# Allegro board TubiiPCB_V2.brd

Outline 406.4 x 406.4 mm; copper layers: TOP, GND_TOP, VTT, VEE, VCC, GND_BOT, BOTTOM. Coordinates in mm from the lower left corner of the outline.
Outline path: rectangle 0,0 406.4,406.4

## Design rules (mm)
net group DP_BCKP_CLK_BUFD: nets BCKP_CLK_BUFD_N BCKP_CLK_BUFD_P
net group DP_CHANGE_CLK2: nets CHANGE_CLK2_N CHANGE_CLK2_P
net group DP_CHOSEN_CLK: nets CHOSEN_CLK_N CHOSEN_CLK_P
net group DP_CHOSEN_CLK2: nets CHOSEN_CLK2_N CHOSEN_CLK2_P
net group DP_CLK_BAD: nets CLK_BAD_N CLK_BAD_P
net group DP_DEF_CLK_DIV2: nets DEF_CLK_DIV2_N DEF_CLK_DIV2_P
net group DP_DEF_CLK_DIV4: nets DEF_CLK_DIV4_N DEF_CLK_DIV4_P
net group DP_DEF_CLK_DIV8: nets DEF_CLK_DIV8_N DEF_CLK_DIV8_P
net group DP_DEF_CLK_DIVD: nets DEF_CLK_DIVD_N DEF_CLK_DIVD_P
net group DP_GT2_N: nets GT2_N UNNAMED_1_CAENCOMS_I8_GT2P
net group DP_RIB1: nets RIB1_N RIB1_P
net group DP_RIB2: nets RIB2_N RIB2_P
net group DP_RIB3: nets RIB3_N RIB3_P
net group DP_RIB4: nets RIB4_N RIB4_P
net group DP_RIB5: nets RIB5_N RIB5_P
net group DP_RIB6: nets RIB6_N RIB6_P
net group DP_RIB7: nets RIB7_N RIB7_P
net group DP_RIB8: nets RIB8_N RIB8_P
net group DP_RIB9: nets RIB9_N RIB9_P
net group DP_RIB10: nets RIB10_N RIB10_P
net group DP_SMELLIE_DELAY_BUF: nets SMELLIE_DELAY_BUF_N SMELLIE_DELAY_BUF_P
net group DP_SYNC24_2: nets SYNC24_2_N SYNC24_2_P
net group DP_SYNC_2: nets SYNC_2_N SYNC_2_P
net group DP_TELLIE_DELAY_BUF: nets TELLIE_DELAY_BUF_N TELLIE_DELAY_BUF_P
net group DP_TRIG_GATE1: nets TRIG_GATE1_N TRIG_GATE1_P
net group DP_TRIG_GATE2: nets TRIG_GATE2_N TRIG_GATE2_P
net group DP_TRIG_PULS1: nets TRIG_PULS1_N TRIG_PULS1_P
net group DP_TRIG_PULS2: nets TRIG_PULS2_N TRIG_PULS2_P
net group DP_UNNAMED_1_AD96687_I1_Q1: nets UNNAMED_1_AD96687_I1_Q1 UNNAMED_1_AD96687_I1_Q1_1
net group DP_UNNAMED_1_AD96687_I1_Q2: nets UNNAMED_1_AD96687_I1_Q2 UNNAMED_1_AD96687_I1_Q2_1
net group DP_UNNAMED_1_CHANGECLKS_I3_BCKPCLK2: nets UNNAMED_1_CHANGECLKS_I3_BCKPC_1 UNNAMED_1_CHANGECLKS_I3_BCKPCLK
net group DP_UNNAMED_1_CHANGECLKS_I3_BCKPCLK3: nets UNNAMED_1_CHANGECLKS_I3_BCKPC_2 UNNAMED_1_CHANGECLKS_I3_BCKPC_3
net group DP_UNNAMED_1_CHANGECLKS_I3_CHANGECLK: nets UNNAMED_1_CHANGECLKS_I3_CHANG_1 UNNAMED_1_CHANGECLKS_I3_CHANGEC
net group DP_UNNAMED_1_CHANGECLKS_I3_DEFAULTCLK2: nets UNNAMED_1_CHANGECLKS_I3_DEFAU_1 UNNAMED_1_CHANGECLKS_I3_DEFAULT
net group DP_UNNAMED_1_CSMD0603_I10_B: nets UNNAMED_1_CSMD0603_I10_B_1 UNNAMED_1_FRONTPORTS_I2_SMELLIE
net group DP_UNNAMED_1_CSMD0603_I54_B: nets UNNAMED_1_CSMD0603_I54_B UNNAMED_1_FRONTPORTS_I2_EXTT<0>
net group DP_UNNAMED_1_CSMD0603_I55_A: nets UNNAMED_1_CSMD0603_I55_A UNNAMED_1_FRONTPORTS_I2_EXTT<4>
net group DP_UNNAMED_1_CSMD0805_I64_B: nets UNNAMED_1_CSMD0805_I64_B UNNAMED_1_CSMD0805_I70_B
net group DP_UNNAMED_1_DEFAULTCLKSEL_I1_DEFAULTCLK: nets UNNAMED_1_DEFAULTCLKSEL_I1_BCKP UNNAMED_1_MC10E116_I1_D0
net group DP_UNNAMED_1_FRONTPORTS_I2_CLK100: nets UNNAMED_1_FRONTPORTS_I2_CLK100N UNNAMED_1_FRONTPORTS_I2_CLK100P
net group DP_UNNAMED_1_FRONTPORTS_I2_ECLTOLVDSIN: nets UNNAMED_1_FRONTPORTS_I2_ECLTOLV UNNAMED_1_MC10E116_I22_D0
net group DP_UNNAMED_1_FRONTPORTS_I2_GT: nets UNNAMED_1_FRONTPORTS_I2_GTN UNNAMED_1_FRONTPORTS_I2_GTP
net group DP_UNNAMED_1_FRONTPORTS_I2_LOSTAROUT: nets UNNAMED_1_FRONTPORTS_I2_LOSTA_1 UNNAMED_1_FRONTPORTS_I2_LOSTARO
net group DP_UNNAMED_1_FRONTPORTS_I2_MTCAMIMIC1OUT: nets UNNAMED_1_FRONTPORTS_I2_MTCAM_1 UNNAMED_1_FRONTPORTS_I2_MTCAMIM
net group DP_UNNAMED_1_FRONTPORTS_I2_MTCAMIMIC2OUT: nets UNNAMED_1_FRONTPORTS_I2_MTCAM_3 UNNAMED_1_FRONTPORTS_I2_MTCAM_4
net group DP_UNNAMED_1_FRONTPORTS_I2_MTCDLO: nets LO_STAR_RAW UNNAMED_1_MC10E116_I2_D0
net group DP_UNNAMED_1_FRONTPORTS_I2_RIBBONPULSEIN: nets UNNAMED_1_FRONTPORTS_I2_RIBBO_1 UNNAMED_1_FRONTPORTS_I2_RIBBONP
net group DP_UNNAMED_1_FRONTPORTS_I2_RIBBONPULSEOUT: nets UNNAMED_1_FRONTPORTS_I2_RIBBO_2 UNNAMED_1_FRONTPORTS_I2_RIBBO_3
net group DP_UNNAMED_1_FRONTPORTS_I2_SYNC: nets UNNAMED_1_FRONTPORTS_I2_SYNCN UNNAMED_1_FRONTPORTS_I2_SYNCP
net group DP_UNNAMED_1_FRONTPORTS_I2_SYNC24: nets UNNAMED_1_FRONTPORTS_I2_SYNC24N UNNAMED_1_FRONTPORTS_I2_SYNC24P
net group DP_UNNAMED_1_FRONTPORTS_I2_SYNC24LVDS: nets UNNAMED_1_FRONTPORTS_I2_SYNC2_1 UNNAMED_1_FRONTPORTS_I2_SYNC24L
net group DP_UNNAMED_1_FRONTPORTS_I2_SYNCLVDS: nets UNNAMED_1_FRONTPORTS_I2_SYNCL_1 UNNAMED_1_FRONTPORTS_I2_SYNCLVD
net group DP_UNNAMED_1_MC10E116_I1_Q0: nets UNNAMED_1_MC10E116_I1_Q0 UNNAMED_1_MC10E116_I1_Q0_1
net group DP_UNNAMED_1_MC10E116_I1_Q3: nets UNNAMED_1_MC10E116_I1_Q3 UNNAMED_1_MC10E116_I1_Q3_1
net group DP_UNNAMED_1_MC10E116_I3_Q0: nets UNNAMED_1_MC10E116_I3_Q0 UNNAMED_1_MC10E116_I3_Q0_1
net group DP_UNNAMED_1_MC10E116_I3_Q1: nets UNNAMED_1_MC10E116_I3_Q1 UNNAMED_1_MC10E116_I3_Q1_1
net group DP_UNNAMED_1_MC10E116_I3_Q2: nets UNNAMED_1_MC10E116_I3_Q2 UNNAMED_1_MC10E116_I3_Q2_1
net group DP_UNNAMED_1_MC10E116_I3_Q3: nets UNNAMED_1_MC10E116_I3_Q3 UNNAMED_1_MC10E116_I3_Q3_1
net group DP_UNNAMED_1_MC10E116_I4_Q0: nets UNNAMED_1_MC10E116_I4_Q0 UNNAMED_1_MC10E116_I4_Q0_1
net group DP_UNNAMED_1_MC10E116_I4_Q1: nets UNNAMED_1_MC10E116_I4_Q1 UNNAMED_1_MC10E116_I4_Q1_1
net group DP_UNNAMED_1_MC10E116_I4_Q2: nets UNNAMED_1_MC10E116_I4_Q2 UNNAMED_1_MC10E116_I4_Q2_1
net group DP_UNNAMED_1_MC10E116_I4_Q3: nets UNNAMED_1_MC10E116_I4_Q3 UNNAMED_1_MC10E116_I4_Q3_1
net group DP_UNNAMED_1_MC10E116_I22_Q0: nets UNNAMED_1_MC10E116_I22_Q0 UNNAMED_1_MC10E116_I22_Q0_1
net group DP_UNNAMED_1_MC10E116_I22_Q1: nets UNNAMED_1_MC10E116_I22_Q1 UNNAMED_1_MC10E116_I22_Q1_1
net group DP_USE_BCKP: nets USE_BCKP_N USE_BCKP_P
net group DP_USE_DEFAULT: nets USE_DEFAULT_N USE_DEFAULT_P
net group BACKPLANE_IN: nets BACKPLANE_IN<1> BACKPLANE_IN<2> BACKPLANE_IN<3> BACKPLANE_IN<4> BACKPLANE_IN<5> BACKPLANE_IN<6> BACKPLANE_IN<7> BACKPLANE_IN<8> BACKPLANE_IN<9> BACKPLANE_IN<10>
net group BACKPLANE_OUT: nets BACKPLANE_OUT<1> BACKPLANE_OUT<2> BACKPLANE_OUT<3> BACKPLANE_OUT<4> BACKPLANE_OUT<5> BACKPLANE_OUT<6> BACKPLANE_OUT<7> BACKPLANE_OUT<8> BACKPLANE_OUT<9> BACKPLANE_OUT<10>
net group CAEN_BUFF_CNTRL: nets CAEN_BUFF_CNTRL<0> CAEN_BUFF_CNTRL<1> CAEN_BUFF_CNTRL<2> CAEN_BUFF_CNTRL<3> CAEN_BUFF_CNTRL<4> CAEN_BUFF_CNTRL<5> CAEN_BUFF_CNTRL<6> CAEN_BUFF_CNTRL<7>
net group CNTRL_RAW: nets CNTRL_RAW<0> CNTRL_RAW<1> CNTRL_RAW<2> CNTRL_RAW<3> CNTRL_RAW<4> CNTRL_RAW<5> CNTRL_RAW<6> CNTRL_RAW<7>
net group COUNT_DATA_ECL: nets COUNT_DATA_ECL<1> COUNT_DATA_ECL<2> COUNT_DATA_ECL<3> COUNT_DATA_ECL<4> COUNT_DATA_ECL<5> COUNT_DATA_ECL<6> COUNT_DATA_ECL<7>
net group LE: nets UNNAMED_1_HCT238_I53_A0 UNNAMED_1_HCT238_I53_A1 UNNAMED_1_HCT238_I53_A2
net group UNNAMED_1_EXTTRIGS_I70_EXTTRIGO: nets UNNAMED_1_EXTTRIGS_I70_EXTT<10> UNNAMED_1_EXTTRIGS_I70_EXTT<11> UNNAMED_1_EXTTRIGS_I70_EXTT<12> UNNAMED_1_EXTTRIGS_I70_EXTT<13> UNNAMED_1_EXTTRIGS_I70_EXTT<14> UNNAMED_1_EXTTRIGS_I70_EXTT<15> UNNAMED_1_EXTTRIGS_I70_EXTTR<0> UNNAMED_1_EXTTRIGS_I70_EXTTR<1> UNNAMED_1_EXTTRIGS_I70_EXTTR<2> UNNAMED_1_EXTTRIGS_I70_EXTTR<3> UNNAMED_1_EXTTRIGS_I70_EXTTR<4> UNNAMED_1_EXTTRIGS_I70_EXTTR<5> UNNAMED_1_EXTTRIGS_I70_EXTTR<6> UNNAMED_1_EXTTRIGS_I70_EXTTR<7> UNNAMED_1_EXTTRIGS_I70_EXTTR<8> UNNAMED_1_EXTTRIGS_I70_EXTTR<9>
net group UNNAMED_1_FRONTPORTS_I2_CAENOUT: nets UNNAMED_1_FRONTPORTS_I2_CAEN<0> UNNAMED_1_FRONTPORTS_I2_CAEN<1> UNNAMED_1_FRONTPORTS_I2_CAEN<2> UNNAMED_1_FRONTPORTS_I2_CAEN<3> UNNAMED_1_FRONTPORTS_I2_CAEN<4> UNNAMED_1_FRONTPORTS_I2_CAEN<5> UNNAMED_1_FRONTPORTS_I2_CAEN<6> UNNAMED_1_FRONTPORTS_I2_CAEN<7>
net group UNNAMED_1_FRONTPORTS_I2_EXTTRIG: nets UNNAMED_1_FRONTPORTS_I2_EXT<10> UNNAMED_1_FRONTPORTS_I2_EXT<11> UNNAMED_1_FRONTPORTS_I2_EXT<12> UNNAMED_1_FRONTPORTS_I2_EXT<13> UNNAMED_1_FRONTPORTS_I2_EXT<14> UNNAMED_1_FRONTPORTS_I2_EXT<15> UNNAMED_1_FRONTPORTS_I2_EXTT<1> UNNAMED_1_FRONTPORTS_I2_EXTT<2> UNNAMED_1_FRONTPORTS_I2_EXTT<3> UNNAMED_1_FRONTPORTS_I2_EXTT<5> UNNAMED_1_FRONTPORTS_I2_EXTT<6> UNNAMED_1_FRONTPORTS_I2_EXTT<7> UNNAMED_1_FRONTPORTS_I2_EXTT<8> UNNAMED_1_FRONTPORTS_I2_EXTT<9>
net group UNNAMED_1_FRONTPORTS_I2_PULSE_2: nets UNNAMED_1_FRONTPORTS_I2_PUL<10> UNNAMED_1_FRONTPORTS_I2_PUL<11> UNNAMED_1_FRONTPORTS_I2_PULS<0> UNNAMED_1_FRONTPORTS_I2_PULS<1> UNNAMED_1_FRONTPORTS_I2_PULS<2> UNNAMED_1_FRONTPORTS_I2_PULS<3> UNNAMED_1_FRONTPORTS_I2_PULS<4> UNNAMED_1_FRONTPORTS_I2_PULS<5> UNNAMED_1_FRONTPORTS_I2_PULS<6> UNNAMED_1_FRONTPORTS_I2_PULS<7> UNNAMED_1_FRONTPORTS_I2_PULS<8> UNNAMED_1_FRONTPORTS_I2_PULS<9>
net group UNNAMED_1_FRONTPORTS_I2_SCALER: nets UNNAMED_1_FRONTPORTS_I2_SCAL<1> UNNAMED_1_FRONTPORTS_I2_SCAL<2> UNNAMED_1_FRONTPORTS_I2_SCAL<3> UNNAMED_1_FRONTPORTS_I2_SCAL<4> UNNAMED_1_FRONTPORTS_I2_SCAL<5> UNNAMED_1_FRONTPORTS_I2_SCAL<6>
net group UNNAMED_1_FRONTPORTS_I2_SCOPEOU: nets UNNAMED_1_FRONTPORTS_I2_SCOP<0> UNNAMED_1_FRONTPORTS_I2_SCOP<1> UNNAMED_1_FRONTPORTS_I2_SCOP<2> UNNAMED_1_FRONTPORTS_I2_SCOP<3> UNNAMED_1_FRONTPORTS_I2_SCOP<4> UNNAMED_1_FRONTPORTS_I2_SCOP<5> UNNAMED_1_FRONTPORTS_I2_SCOP<6> UNNAMED_1_FRONTPORTS_I2_SCOP<7>

## Placement (name value [footprint] x y rotation side)
C1  0.1UF  [CAP0603]  67.31 332.74 90 top
C2  0.1UF  [CAP0603]  73.66 313.69 0 top
C3  0.1UF  [CAP0603]  67.31 313.69 90 top
C4  1.0UF  [CAP0603]  276.86 288.29 0 top
C5  1.0UF  [CAP0603]  270.51 288.29 90 top
C6  1.0UF  [CAP0603]  283.21 307.34 90 top
C7  1.0UF  [CAP0603]  283.21 307.34 0 top
C8  0.1UF  [CAP805]  295.91 313.69 180 top
C9  1.0UF  [CAP0603]  270.51 288.29 0 top
C10  0.1UF  [CAP805]  283.21 326.39 0 top
C11  0.1UF  [CAP0603]  213.36 256.54 270 top
C12  0.1UF  [CAP0603]  207.01 262.89 270 top
C13  0.1UF  [CAP0603]  226.06 250.19 90 top
C14  0.1UF  [CAP0603]  207.01 262.89 180 top
C15  0.1UF  [CAP0603]  226.06 243.84 90 top
C16  1.0UF  [CAP805]  190.5 302.26 90 top
C17  1.0UF  [CAP805]  203.2 317.5 90 top
C18  1.0UF  [CAP805]  203.2 302.26 270 top
C19  1.0UF  [CAP805]  190.5 317.5 90 top
C20  1.0UF  [CAP805]  215.9 302.26 90 top
C21  1.0UF  [CAP805]  215.9 317.5 270 top
C47  0.1UF  [CAP0603]  289.56 180.34 180 top
C48  0.1UF  [CAP0603]  281.94 187.96 180 top
C49  0.1UF  [CAP805]  289.56 212.09 0 top
C50  1.0UF  [CAP0603]  276.86 180.34 180 top
C51  0.1UF  [CAP805]  302.26 199.39 180 top
C84  0.1UF  [CAP0603]  213.36 199.39 90 top
C85  0.1UF  [CAP0603]  226.06 205.74 270 top
C86  0.1UF  [CAP0603]  306.12 255.27 180 bottom
C87  0.1UF  [CAP0603]  281.3 252.73 90 bottom
D1  -  [LED_SSFLXH1031D]  289.56 307.34 180 top
D2  -  [LED_SSFLXH1031D]  295.91 326.39 180 top
D3  -  [LED_SSFLXH1031D]  194.31 256.54 180 top
D5  -  [LED_SSFLXH1031D]  302.26 212.09 180 top
D6  -  [LED_SSFLXH1031D]  295.91 193.04 180 top
R1  10K  [RES805]  283.21 320.04 180 top
R2  10K  [RES805]  295.91 320.04 0 top
R3  100  [RES805]  289.56 326.39 180 top
R4  100  [RES805]  289.56 313.69 0 top
R5  100  [RES805]  187.96 262.89 180 top
R6  50  [RES805]  207.01 256.54 0 top
R7  50  [RES805]  200.66 256.54 0 top
R8  50  [RES805]  207.01 262.89 180 top
R9  50  [RES805]  194.31 262.89 180 top
R10  50  [RES805]  200.66 262.89 180 top
R11  50  [RES805]  219.71 262.89 180 top
R38  10K  [RES805]  302.26 205.74 0 top
R39  10K  [RES805]  289.56 205.74 180 top
R40  100  [RES805]  295.91 199.39 0 top
R41  100  [RES805]  295.91 212.09 180 top
R86  1000  [RES805]  219.71 193.04 180 top
R87  1000  [RES805]  213.36 199.39 180 top
R88  50  [RES805]  314.96 254 0 top
R89  50  [RES805]  314.96 248.92 180 top
R90  50  [RES805]  299.72 259.08 270 bottom
R91  50  [RES805]  304.8 259.08 90 bottom
R92  50  [RES805]  304.8 248.92 90 bottom
R93  50  [RES805]  297.18 254 180 bottom
R94  50  [RES805]  284.48 259.08 270 bottom
R95  50  [RES805]  289.56 259.08 90 bottom
R96  50  [RES805]  287.02 248.92 90 bottom
R97  50  [RES805]  287.02 251.46 90 bottom
R98  50  [RES805]  289.56 243.84 90 bottom
R99  50  [RES805]  284.48 243.84 270 bottom
TP1  -  [FEC32DTP]  81.92 320.04 0 top
TP2  -  [FEC32DTP]  81.92 326.39 0 top
TP3  -  [FEC32DTP]  54.61 339.09 0 top
TP4  -  [FEC32DTP]  54.61 332.74 0 top
TP5  -  [FEC32DTP]  60.96 339.09 0 top
TP6  -  [FEC32DTP]  67.31 339.09 0 top
TP7  -  [FEC32DTP]  75.56 320.04 0 top
TP8  -  [FEC32DTP]  67.31 332.74 0 top
TP9  -  [FEC32DTP]  60.96 307.34 0 top
TP10  -  [FEC32DTP]  54.61 307.34 0 top
U1  ***  [SOIC16]  276.86 326.39 270 top
U2  ***  [SOIC14]  75.56 332.74 180 top
U3  ***  [SSOP16]  60.96 332.74 0 top
U4  ***  [SOIC20]  67.31 320.04 270 top
U6  -  [CONN10]  208.28 297.18 180 top
U7  ***  [SOIC16]  276.86 320.04 270 top
U8  ***  [PLCC20]  276.86 307.34 270 top
U9  ***  [SOIC16]  289.56 320.04 270 top
U10  ***  [PLCC20]  213.36 262.89 270 top
U11  ***  [PLCC28]  219.71 250.19 270 top
U12  ***  [PLCC20]  226.06 262.89 180 top
U13  ***  [SOIC14]  203.2 309.88 0 top
U14  ***  [SOIC14]  190.5 309.88 0 top
U15  ***  [SOIC8]  215.9 309.88 0 top
U16  -  [CONN10]  195.58 322.58 0 top
U36  ***  [SOIC16]  283.21 212.09 270 top
U37  ***  [SOIC16]  283.21 205.74 270 top
U38  ***  [SOIC16]  295.91 205.74 90 top
U50  ***  [SOIC8]  219.71 199.39 180 top
U51  ***  [PLCC20]  287.02 251.46 270 top
U52  ***  [PLCC20]  304.8 251.46 180 top
U53  -  [CONN10]  289.56 264.16 0 top
U54  -  [CONN10]  299.72 238.76 180 top

## Library data of the parts
C1-C3 = CSMD0603: Tolerance: ***; User Part Number: 0603; part number: CSMD0603-0.1UF,10%,0603,50V; room: CNTRL_REG
C4-C7 C9 = CSMD0603: Tolerance: ***; User Part Number: 0603; part number: CSMD0603-1.0UF,10%,0603,25V; room: GT_DELAY
C8 C10 = CSMD0805: part number: CSMD0805-0.1UF,5%,0805,50V; room: GT_DELAY
C11-C15 = CSMD0603: Tolerance: ***; User Part Number: 0603; part number: CSMD0603-0.1UF,10%,0603,50V; room: SEL_LO
C16-C21 = CSMD0805: part number: CSMD0805-1.0UF,10%,0805,25V; room: BASE_BUFFER
C47 C48 = CSMD0603: Tolerance: ***; User Part Number: 0603; part number: CSMD0603-0.1UF,10%,0603,50V; room: GENERIC_DELAYS
C49 C51 = CSMD0805: part number: CSMD0805-0.1UF,5%,0805,50V; room: GENERIC_DELAYS
C50 = CSMD0603: Tolerance: ***; User Part Number: 0603; part number: CSMD0603-1.0UF,10%,0603,25V; room: GENERIC_DELAYS
C84 C85 = CSMD0603: Tolerance: ***; User Part Number: 0603; part number: CSMD0603-0.1UF,10%,0603,50V; room: PULSE_INV
C86 C87 = CSMD0603: Tolerance: ***; User Part Number: 0603; part number: CSMD0603-0.1UF,10%,0603,50V; room: RIBBON_DELAY
D1 D2 = LED_L: room: GT_DELAY
D3 = LED_L: room: SEL_LO
D5 D6 = LED_L: room: GENERIC_DELAYS
R1 R2 = RSMD0805: part number: RSMD0805-10K,1%,0805; room: GT_DELAY
R3 R4 = RSMD0805: part number: RSMD0805-100,1%,0805; room: GT_DELAY
R5 = RSMD0805: part number: RSMD0805-100,1%,0805; room: SEL_LO
R6-R11 = RSMD0805: part number: RSMD0805-50,1%,0805; room: SEL_LO
R38 R39 = RSMD0805: part number: RSMD0805-10K,1%,0805; room: GENERIC_DELAYS
R40 R41 = RSMD0805: part number: RSMD0805-100,1%,0805; room: GENERIC_DELAYS
R86 R87 = RSMD0805: part number: RSMD0805-1000,1%,0805; room: PULSE_INV
R88-R99 = RSMD0805: part number: RSMD0805-50,1%,0805; room: RIBBON_DELAY
TP1-TP10 = TESTPOINT_L: room: CNTRL_REG
U1 = DS1023200: room: GT_DELAY
U2 = 74F164: room: CNTRL_REG
U3 = 74HCT165: room: CNTRL_REG
U4 = HCT374_1: room: CNTRL_REG
U6 U16 = IDS_C10: User Part Number: ***; room: BASE_BUFFER
U7 = DS1023500: room: GT_DELAY
U8 = MC10H124: room: GT_DELAY
U9 = HCT123: room: GT_DELAY
U10 = MC10H124: room: SEL_LO
U11 = MC10E116: room: SEL_LO
U12 = MC10H104: room: SEL_LO
U13 U14 = OPA4277: room: BASE_BUFFER
U15 = OPA2277: room: BASE_BUFFER
U36 U37 = DS102350: room: GENERIC_DELAYS
U38 = HCT123: room: GENERIC_DELAYS
U50 = AD8009: room: PULSE_INV
U51 U52 = MC10H116: room: RIBBON_DELAY
U53 U54 = IDS_C10: User Part Number: ***; room: RIBBON_DELAY

## Footprints (pads in the part's own frame, mm; a bottom-side part is the same pattern mirrored in y, then rotated)
CAP0603
  rect 0.635x0.889 smd: 1(0,-2.54) 2(1.321,-2.54)
CAP805
  rect 1.372x1.27 smd: 1(0,1.001) 2(0,-1.001)
CONN10
  round 1.524 hole 0.914: 1(0,0) 2(0,2.54) 3(2.54,0) 4(2.54,2.54) 5(5.08,0) 6(5.08,2.54) 7(7.62,0) 8(7.62,2.54) 9(10.16,0) 10(10.16,2.54)
FEC32DTP
  rect 1.524x1.524 hole 0.914: 1(0,0)
LED_SSFLXH1031D
  round 1.001 hole 0.8: 1(0,0) 2(0,-2.499)
PLCC20
  rect 0.635x1.27 smd: 1(0,4.318) 2(-1.27,4.318) 3(-2.54,4.318) 9(-2.54,-4.318) 10(-1.27,-4.318) 11(0,-4.318) 12(1.27,-4.318) 13(2.54,-4.318) 19(2.54,4.318) 20(1.27,4.318)
  rect 1.27x0.635 smd: 4(-4.318,2.54) 5(-4.318,1.27) 6(-4.318,0) 7(-4.318,-1.27) 8(-4.318,-2.54) 14(4.318,-2.54) 15(4.318,-1.27) 16(4.318,0) 17(4.318,1.27) 18(4.318,2.54)
PLCC28
  rect 0.635x1.27 smd: 1(0,5.588) 2(-1.27,5.588) 3(-2.54,5.588) 4(-3.81,5.588) 12(-3.81,-5.588) 13(-2.54,-5.588) 14(-1.27,-5.588) 15(0,-5.588) 16(1.27,-5.588) 17(2.54,-5.588) 18(3.81,-5.588) 26(3.81,5.588) 27(2.54,5.588) 28(1.27,5.588)
  rect 1.27x0.635 smd: 5(-5.588,3.81) 6(-5.588,2.54) 7(-5.588,1.27) 8(-5.588,0) 9(-5.588,-1.27) 10(-5.588,-2.54) 11(-5.588,-3.81) 19(5.588,-3.81) 20(5.588,-2.54) 21(5.588,-1.27) 22(5.588,0) 23(5.588,1.27) 24(5.588,2.54) 25(5.588,3.81)
RES805
  rect 1.372x1.27 smd: 1(0,1.001) 2(0,-1.001)
SOIC8
  rect 1.27x0.635 smd: 1(-2.477,1.905) 2(-2.477,0.635) 3(-2.477,-0.635) 4(-2.477,-1.905) 5(2.477,-1.905) 6(2.477,-0.635) 7(2.477,0.635) 8(2.477,1.905)
SOIC14
  rect 1.27x0.635 smd: 1(-2.477,3.81) 2(-2.477,2.54) 3(-2.477,1.27) 4(-2.477,0) 5(-2.477,-1.27) 6(-2.477,-2.54) 7(-2.477,-3.81) 8(2.477,-3.81) 9(2.477,-2.54) 10(2.477,-1.27) 11(2.477,0) 12(2.477,1.27) 13(2.477,2.54) 14(2.477,3.81)
SOIC16
  rect 1.27x0.635 smd: 1(-2.477,4.445) 2(-2.477,3.175) 3(-2.477,1.905) 4(-2.477,0.635) 5(-2.477,-0.635) 6(-2.477,-1.905) 7(-2.477,-3.175) 8(-2.477,-4.445) 9(2.477,-4.445) 10(2.477,-3.175) 11(2.477,-1.905) 12(2.477,-0.635) 13(2.477,0.635) 14(2.477,1.905) 15(2.477,3.175) 16(2.477,4.445)
SOIC20
  rect 1.27x0.635 smd: 1(0,0) 2(0,-1.27) 3(0,-2.54) 4(0,-3.81) 5(0,-5.08) 6(0,-6.35) 7(0,-7.62) 8(0,-8.89) 9(0,-10.16) 10(0,-11.43) 11(8.788,-11.43) 12(8.788,-10.16) 13(8.788,-8.89) 14(8.788,-7.62) 15(8.788,-6.35) 16(8.788,-5.08) 17(8.788,-3.81) 18(8.788,-2.54) 19(8.788,-1.27) 20(8.788,0)
SSOP16
  rect 1.651x0.33 smd: 1(-3.505,2.276) 2(-3.505,1.626) 3(-3.505,0.975) 4(-3.505,0.325) 5(-3.505,-0.325) 6(-3.505,-0.975) 7(-3.505,-1.626) 8(-3.505,-2.276) 9(3.505,-2.276) 10(3.505,-1.626) 11(3.505,-0.975) 12(3.505,-0.325) 13(3.505,0.325) 14(3.505,0.975) 15(3.505,1.626) 16(3.505,2.276)

## Nets
GND: C2.1(A<0>) C4.2(B<0>) C5.1(A<0>) C8.1(A<0>) C9.2(B<0>) C10.1(A<0>) C11.1(A<0>) C47.1(A<0>) C48.1(A<0>) C49.1(A<0>) C50.2(B<0>) C51.1(A<0>) C86.2(B<0>) C87.2(B<0>) D1.1(B) D2.1(B) D3.1(B) D5.1(B) D6.1(B) U1.8(GND) U1.11(MS) U3.8(GND) U7.8(GND) U7.11(MS) U9.1(IN_A1*) U9.6(CEXT2) U9.8(GND) U9.9(IN_A2*) U9.14(CEXT1) U36.8(GND) U36.11(MS) U37.8(GND) U37.11(MS) U38.1(IN_A1*) U38.6(CEXT2) U38.8(GND) U38.9(IN_A2*) U38.14(CEXT1) U50.3(IN+) U51.2(GND1) U51.20(GND2) U52.2(GND1) U52.20(GND2)
VCC: C2.2(B<0>) C4.1(A<0>) C5.2(B<0>) C6.2(B<0>) C9.1(A<0>) C17.2(B<0>) C19.2(B<0>) C21.2(B<0>) C47.2(B<0>) C48.2(B<0>) C50.1(A<0>) C84.2(B<0>) R1.1(A<0>) R2.1(A<0>) R38.1(A<0>) R39.1(A<0>) U1.14(PS) U1.16(VCC) U2.9(MR*) U3.16(VCC) U4.1(OE*) U7.14(PS) U7.16(VCC) U8.12(VCC) U9.3(RD1*) U9.11(RD2*) U9.16(VCC) U36.14(PS) U36.16(VCC) U37.14(PS) U37.16(VCC) U38.3(RD1*) U38.11(RD2*) U38.16(VCC)
VEE: C7.1(A<0>) C16.1(A<0>) C18.2(B<0>) C20.2(B<0>) C85.1(A<0>) C86.1(A<0>) C87.1(A<0>) U8.10(VEE) U51.10(VEE) U52.10(VEE)
BACKPLANE_IN<1>: U6.1(PIN1) U13.3(+IN_A)
BACKPLANE_IN<2>: U6.3(PIN3) U13.5(+IN_B)
BACKPLANE_IN<3>: U6.5(PIN5) U13.10(+IN_C)
BACKPLANE_IN<4>: U6.7(PIN7) U13.12(+IN_D)
BACKPLANE_IN<5>: U6.2(PIN2) U14.3(+IN_A)
BACKPLANE_IN<6>: U6.4(PIN4) U14.5(+IN_B)
BACKPLANE_IN<7>: U6.6(PIN6) U14.10(+IN_C)
BACKPLANE_IN<8>: U6.8(PIN8) U14.12(+IN_D)
BACKPLANE_IN<9>: U6.10(PIN10) U15.2(+IN_A)
BACKPLANE_IN<10>: U6.9(PIN9) U15.5(+IN_B)
BACKPLANE_OUT<1>: U13.1(OUT_A) U13.2(-IN_A) U16.1(PIN1)
BACKPLANE_OUT<2>: U13.6(-IN_B) U13.7(OUT_B) U16.3(PIN3)
BACKPLANE_OUT<3>: U13.8(OUT_C) U13.9(-IN_C) U16.5(PIN5)
BACKPLANE_OUT<4>: U13.13(-IN_D) U13.14(OUT_D) U16.7(PIN7)
BACKPLANE_OUT<5>: U14.1(OUT_A) U14.2(-IN_A) U16.2(PIN2)
BACKPLANE_OUT<6>: U14.6(-IN_B) U14.7(OUT_B) U16.4(PIN4)
BACKPLANE_OUT<7>: U14.8(OUT_C) U14.9(-IN_C) U16.6(PIN6)
BACKPLANE_OUT<8>: U14.13(-IN_D) U14.14(OUT_D) U16.8(PIN8)
BACKPLANE_OUT<9>: U15.1(OUT_A) U15.3(-IN_A) U16.10(PIN10)
BACKPLANE_OUT<10>: U15.6(-IN_B) U15.7(OUT_B) U16.9(PIN9)
CNTRL_RAW<0>: TP8.1(A) U2.3(Q0) U3.11(D0) U4.2(D0)
CNTRL_RAW<1>: TP7.1(A) U2.4(Q1) U3.12(D1) U4.3(D1)
CNTRL_RAW<2>: TP6.1(A) U2.5(Q2) U3.13(D2) U4.4(D2)
CNTRL_RAW<3>: TP5.1(A) U2.6(Q3) U3.14(D3) U4.5(D3)
CNTRL_RAW<4>: TP4.1(A) U2.10(Q4) U3.3(D4) U4.6(D4)
CNTRL_RAW<5>: TP3.1(A) U2.11(Q5) U3.4(D5) U4.7(D5)
CNTRL_RAW<6>: TP2.1(A) U2.12(Q6) U3.5(D6) U4.8(D6)
CNTRL_RAW<7>: TP1.1(A) U2.13(Q7) U3.6(D7) U4.9(D7)
DDGT_BITS: U1.3(Q/P0) U7.5(D/P2)
DDGT_TTL: U7.9(PWM) U8.9(B_IN) U9.10(IN_B2)
DGT_TTL: U1.15(OUT) U8.7(A_IN) U8.13(C_IN) U9.2(IN_B1)
LE_CNTRL_REG: U2.2(DSB)
LE_GEN_UTILS: U36.2(LE*) U37.2(LE*)
LE_GT_DELAYS: U1.2(LE*) U7.2(LE*)
LO_SEL_ECL_N: R9.2(B<0>) U10.5(A_OUT*) U12.8(A2)
LO_SEL_ECL_P: R10.2(B<0>) U10.3(A_OUT) U12.5(A1)
LO_STAR_RAW: R7.2(B<0>) U11.5(D1) U11.27(D2) U12.3(Q1) U12.4(Q2)
RIB1_N: U52.3(Q1*) U53.1(PIN1)
RIB1_P: U52.4(Q1) U53.2(PIN2)
RIB2_N: R95.2(B<0>) U51.5(D1*) U54.1(PIN1)
RIB2_P: R94.2(B<0>) U51.7(D1) U54.2(PIN2)
RIB3_N: U51.3(Q1*) U54.3(PIN3)
RIB3_P: U51.4(Q1) U54.4(PIN4)
RIB4_N: R91.2(B<0>) U52.12(D2*) U53.3(PIN3)
RIB4_P: R90.2(B<0>) U52.13(D2) U53.4(PIN4)
RIB5_N: U52.8(Q2*) U53.5(PIN5)
RIB5_P: U52.9(Q2) U53.6(PIN6)
RIB6_N: R97.2(B<0>) U51.12(D2*) U54.5(PIN5)
RIB6_P: R96.2(B<0>) U51.13(D2) U54.6(PIN6)
RIB7_N: U51.8(Q2*) U54.7(PIN7)
RIB7_P: U51.9(Q2) U54.8(PIN8)
RIB8_N: R93.2(B<0>) U52.15(D3*) U53.7(PIN7)
RIB8_P: R92.2(B<0>) U52.17(D3) U53.8(PIN8)
RIB9_N: U52.18(Q3*) U53.9(PIN9)
RIB9_P: U52.19(Q3) U53.10(PIN10)
RIB10_N: R99.2(B<0>) U51.15(D3*) U54.9(PIN9)
RIB10_P: R98.2(B<0>) U51.17(D3) U54.10(PIN10)
SR_CLK: U1.4(CLK/P1) U2.8(CP) U3.2(CP) U7.4(CLK/P1) U36.4(CLK/P1) U37.4(CLK/P1)
SR_DATA: U1.5(D/P2) U2.1(DSA) U36.5(D/P2)
UNNAMED_1_74F164_I1_GND: C1.1(A<0>) U2.7(GND)
UNNAMED_1_74F164_I1_VCC: C1.2(B<0>) U2.14(VCC)
UNNAMED_1_AD8009_I1_IN: R86.2(B<0>) R87.1(A<0>) U50.2(IN-)
UNNAMED_1_AD8009_I1_V: C84.1(A<0>) U50.7(V+)
UNNAMED_1_AD8009_I1_V_1: C85.2(B<0>) U50.4(V-)
UNNAMED_1_CAENCOMS_I8_GTTTL: U1.1(IN) U7.1(IN)
UNNAMED_1_CLOCKS_I2_CLKSEL: U4.19(Q0)
UNNAMED_1_CNTRLREGISTER_I10_DAT: U4.11(CLK)
UNNAMED_1_CNTRLREGISTER_I10_ECA: U4.17(Q2)
UNNAMED_1_CNTRLREGISTER_I10_LOS: R5.2(B<0>) U4.18(Q1) U10.7(A_IN)
UNNAMED_1_CNTRLREGISTER_I10_REA: U3.1(PL*) U3.15(CE*)
UNNAMED_1_CNTRLREGISTER_I10_REG: U3.9(Q7) U3.10(DS)
UNNAMED_1_CSMD0603_I6_A: C3.1(A<0>) U4.20(VCC)
UNNAMED_1_CSMD0603_I6_A_1: C12.1(A<0>) U10.12(VCC)
UNNAMED_1_CSMD0603_I6_B: C3.2(B<0>) U4.10(GND)
UNNAMED_1_CSMD0603_I6_B_1: C12.2(B<0>) C14.1(A<0>) U10.20(GND)
UNNAMED_1_CSMD0603_I7_A: C13.1(A<0>) U11.1(VEE)
UNNAMED_1_CSMD0603_I7_B: C13.2(B<0>) U11.7(GND0) U11.10(GND1) U11.13(GND2) U11.16(GND3) U11.19(GND4) U11.22(GND5)
UNNAMED_1_CSMD0603_I8_B: C14.2(B<0>) U10.10(VEE)
UNNAMED_1_CSMD0603_I9_A: C15.1(A<0>) U12.2(GND1) U12.20(GND2)
UNNAMED_1_CSMD0603_I9_B: C15.2(B<0>) U12.10(VEE)
UNNAMED_1_CSMD0603_I12_A: C6.1(A<0>) C7.2(B<0>) U8.20(GND)
UNNAMED_1_CSMD0805_I6_A: C17.1(A<0>) U13.4(V+)
UNNAMED_1_CSMD0805_I7_A_1: C18.1(A<0>) U13.11(V-)
UNNAMED_1_CSMD0805_I8_A_1: C19.1(A<0>) U14.4(V+)
UNNAMED_1_CSMD0805_I9_B_1: C16.2(B<0>) U14.11(V-)
UNNAMED_1_CSMD0805_I10_A: C21.1(A<0>) U15.8(V+)
UNNAMED_1_CSMD0805_I11_A: C20.1(A<0>) U15.4(V-)
UNNAMED_1_CSMD0805_I13_B: C51.2(B<0>) R38.2(B<0>) U38.7(REXT/CEXT2)
UNNAMED_1_CSMD0805_I14_B: C10.2(B<0>) R1.2(B<0>) U9.7(REXT/CEXT2)
UNNAMED_1_CSMD0805_I14_B_1: C49.2(B<0>) R39.2(B<0>) U38.15(REXT/CEXT1)
UNNAMED_1_CSMD0805_I15_B: C8.2(B<0>) R2.2(B<0>) U9.15(REXT/CEXT1)
UNNAMED_1_DS102350_I1_Q: U36.3(Q/P0) U37.5(D/P2)
UNNAMED_1_FRONTPORTS_I2_DGTN: U8.5(A_OUT*)
UNNAMED_1_FRONTPORTS_I2_DGTP: U8.3(A_OUT)
UNNAMED_1_FRONTPORTS_I2_GENER_1: U37.15(OUT) U38.2(IN_B1)
UNNAMED_1_FRONTPORTS_I2_GENER_2: U36.15(OUT) U38.10(IN_B2)
UNNAMED_1_FRONTPORTS_I2_LOSTA_1: U11.11(Q1)
UNNAMED_1_FRONTPORTS_I2_LOSTARO: U11.12(Q1*)
UNNAMED_1_FRONTPORTS_I2_MTCDLO: R6.2(B<0>) U11.3(D0)
UNNAMED_1_FRONTPORTS_I2_PULSE_1: R87.2(B<0>) U50.6(OUTPUT)
UNNAMED_1_FRONTPORTS_I2_PULSEIN: R86.1(A<0>)
UNNAMED_1_FRONTPORTS_I2_RIBBO_1: R88.2(B<0>) U52.7(D1)
UNNAMED_1_FRONTPORTS_I2_RIBBO_2: U51.18(Q3*)
UNNAMED_1_FRONTPORTS_I2_RIBBO_3: U51.19(Q3)
UNNAMED_1_FRONTPORTS_I2_RIBBONP: R89.2(B<0>) U52.5(D1*)
UNNAMED_1_FRONTPORTS_I2_SCAL<1>: U4.14(Q5)
UNNAMED_1_FRONTPORTS_I2_SCAL<2>: U4.15(Q4)
UNNAMED_1_FRONTPORTS_I2_SCAL<3>: U4.16(Q3)
UNNAMED_1_GENERALUTILITIES_I4_1: U36.1(IN)
UNNAMED_1_GENERALUTILITIES_I4_G: U37.1(IN)
UNNAMED_1_GTDELAYS_I1_DDGTN: R11.2(B<0>) U8.4(B_OUT*) U12.9(B2)
UNNAMED_1_GTDELAYS_I1_DDGTP: U8.2(B_OUT)
UNNAMED_1_HCT123_I9_Q1: R4.1(A<0>) U9.13(Q1)
UNNAMED_1_HCT123_I9_Q2: R3.1(A<0>) U9.5(Q2)
UNNAMED_1_HCT123_I22_Q1: R41.1(A<0>) U38.13(Q1)
UNNAMED_1_HCT123_I22_Q2: R40.1(A<0>) U38.5(Q2)
UNNAMED_1_HCT374_I2_Q6: TP9.1(A) U4.13(Q6)
UNNAMED_1_HCT374_I2_Q7: TP10.1(A) U4.12(Q7)
UNNAMED_1_LEDL_I11_A: D3.2(A) R5.1(A<0>)
UNNAMED_1_LEDL_I17_A: D5.2(A) R41.2(B<0>)
UNNAMED_1_LEDL_I18_A: D1.2(A) R4.2(B<0>)
UNNAMED_1_LEDL_I18_A_1: D6.2(A) R40.2(B<0>)
UNNAMED_1_LEDL_I19_A: D2.2(A) R3.2(B<0>)
UNNAMED_1_LOGEN_I13_DGT2: U8.19(C_OUT)
UNNAMED_1_LOGEN_I13_LOSTAR2: U11.14(Q2)
UNNAMED_1_MC10E116_I2_D0: C11.2(B<0>) U11.2(VBB) U11.4(D0*) U11.6(D1*)
UNNAMED_1_MC10E116_I2_Q0: R8.2(B<0>) U11.8(Q0) U12.7(B1)
VTT: R6.1(A<0>) R7.1(A<0>) R8.1(A<0>) R9.1(A<0>) R10.1(A<0>) R11.1(A<0>) R88.1(A<0>) R89.1(A<0>) R90.1(A<0>) R91.1(A<0>) R92.1(A<0>) R93.1(A<0>) R94.1(A<0>) R95.1(A<0>) R96.1(A<0>) R97.1(A<0>) R98.1(A<0>) R99.1(A<0>)

Pads without a net: U1 6 7 9 10 12 13; U3 7; U7 3 6 7 10 12 13 15; U8 1 6 8 11 14 15 16 17 18; U9 4 12; U10 1 2 4 6 8 9 11 13 14 15 16 17 18 19; U11 9 15 17 18 20 21 23 24 25 26 28; U12 1 6 11 12 13 14 15 16 17 18 19; U36 6 7 9 10 12 13; U37 3 6 7 9 10 12 13; U38 4 12; U50 1 5 8; U51 1 6 11 14 16; U52 1 6 11 14 16

## Via types
v1: diameter 0.61, hole 0.33, TOP to BOTTOM, 77 vias

## Routing (per net, layer and track width the routed paths; a pad name or vN(x,y) marks a point on that pad's centre or on a via; arc(x,y) is an arc through that point)
GND: length 81.3
  TOP w0.178: 291.02,252.73 287.65,252.73 ; 291.02,252.73 U51.2 ; 291.02,252.73 290.55,252.26 290.55,251.94 290.49,251.88 290.49,251.05 290.55,250.99 290.55,250.66 291.02,250.19 U51.20 ; 287.65,252.73 v1(287.02,253.36) ; 287.65,252.73 v1(285.11,252.73) ; U3.8 56.41,330.46 56.41,316.97 73.66,316.97 C2.1 ; v1(302.89,244.47) 303.99,244.47 304.16,244.65 304.16,245.24 305.28,246.35 305.6,246.35 306.07,246.82 U52.2 306.07,247.46 305.6,247.93 305.27,247.93 305.21,247.99 304.39,247.99 304.33,247.93 304,247.93 303.53,247.46 U52.20 v1(303.53,245.74)
  BOTTOM w0.178: v1(285.11,252.73) 281.94,252.73 280.62,254.05 C87.2 ; C86.2 299.72,252.73 297.81,250.82 297.81,248.92 302.26,244.47 v1(302.89,244.47)
VCC: length 8
  TOP w0.178: v1(213.83,318.1) 213.83,317.8 214.14,317.5 C21.2 ; U3.16 v1(63.19,335.02) ; v1(192.9,317.5) C19.2 ; v1(205.6,317.5) C17.2 ; U2.9 v1(72.02,335.28) ; U4.1 v1(67.31,318.63)
VEE: length 15.7
  TOP w0.178: 282.38,252.73 U51.10 ; 282.38,252.73 281.91,252.26 281.91,251.94 281.43,251.46 v1(278.76,251.46) ; 282.38,252.73 v1(280.67,252.73) ; v1(306.12,253.95) 306.12,254.87 306.07,254.92 U52.10 v1(306.07,257.18) ; v1(188.32,302.26) C16.1 ; v1(201.13,302.26) C18.2 ; v1(218.3,302.26) C20.2
  BOTTOM w0.178: C86.1 v1(306.12,253.95) ; C87.1 v1(278.76,251.46)
BACKPLANE_IN<1>: length 21.5
  TOP w0.178: U13.3 200.72,310.54 200.85,310.41 208.28,310.41 v1(208.28,310.41)
  BOTTOM w0.178: U6.1 v1(208.28,310.41)
BACKPLANE_IN<2>: length 14.2
  TOP w0.178: v1(205.74,304.44) 204.83,304.44 201.93,307.34 201.93,307.72 201.04,308.61 U13.5
  BOTTOM w0.178: U6.3 v1(205.74,304.44)
BACKPLANE_IN<3>: length 13.8
  TOP w0.178: U13.10 204.83,308.61 204.6,308.38 v1(203.24,308.38)
  BOTTOM w0.178: U6.5 203.24,297.22 v1(203.24,308.38)
BACKPLANE_IN<4>: length 18.3
  TOP w0.178: U13.12 v1(201.79,311.15)
  BOTTOM w0.178: U6.7 201.79,298.31 v1(201.79,311.15)
BACKPLANE_IN<5>: length 37.5
  TOP w0.178: U14.3 188.87,311.15 188.87,309.43 188.67,309.23 186.68,309.23 186.06,308.61 186.06,302.26 192.34,295.97 206.95,295.97 U6.2
BACKPLANE_IN<6>: length 29.4
  TOP w0.178: U14.5 v1(189.8,308.61)
  BOTTOM w0.178: v1(189.8,308.61) 189.8,300.95 197.8,292.95 204.05,292.95 U6.4
BACKPLANE_IN<7>: length 23.6
  TOP w0.178: U14.10 v1(194.38,308.61)
  BOTTOM w0.178: U6.6 202.22,293.66 197.68,293.66 194.38,296.96 v1(194.38,308.61)
BACKPLANE_IN<8>: length 21.8
  TOP w0.178: U14.12 v1(195.58,311.15)
  BOTTOM w0.178: v1(195.58,311.15) 196.52,311.15 199.45,308.22 199.45,295.85 U6.8
BACKPLANE_IN<9>: length 28.5
  TOP w0.178: 213.42,310.52 212.52,310.52 209.73,307.72 209.73,306.1 204.77,301.14 v1(196.79,301.14)
  BOTTOM w0.178: U6.10 196.79,295.97 v1(196.79,301.14)
BACKPLANE_IN<10>: length 30.4
  TOP w0.178: U15.5 219.33,307.98 219.58,307.72 219.58,302.14 216.32,298.87 199.81,298.87 U6.9
BACKPLANE_OUT<1>: length 15
  TOP w0.178: U13.2 201.68,312.42 201.93,312.67 201.93,313.44 201.68,313.69 U13.1 199.78,313.69 v1(199.78,315.86)
  BOTTOM w0.178: v1(199.78,315.86) 195.58,320.07 U16.1
BACKPLANE_OUT<2>: length 19.2
  TOP w0.178: U13.6 199.62,307.34 ; 199.62,307.34 198.21,308.75 198.21,322.49 U16.3 ; 199.62,307.34 199.62,306.27 199.82,306.07 U13.7
BACKPLANE_OUT<3>: length 22.9
  TOP w0.178: U13.8 U13.9 202.82,307.34 202.56,307.59 202.56,308.61 201.94,309.23 200.1,309.23 198.81,310.53 198.81,318.71 200.66,320.56 U16.5
BACKPLANE_OUT<4>: length 13.6
  TOP w0.178: U13.14 204.83,313.69 ; 204.83,313.69 204.83,312.42 U13.13 ; 204.83,313.69 204.83,315.81 206.14,317.13 206.14,319.64 U16.7
BACKPLANE_OUT<5>: length 22.4
  TOP w0.178: U16.2 194.54,324.08 194.54,312.52 193.9,311.89 189.76,311.89 189.23,312.42 ; U14.2 189.23,312.42 ; 189.23,312.42 189.23,313.44 188.98,313.69 U14.1
BACKPLANE_OUT<6>: length 26.6
  TOP w0.178: U14.6 188.87,307.34 ; 188.87,307.34 v1(190.89,307.34) ; 188.87,307.34 188.87,306.07 U14.7
  BOTTOM w0.178: U16.4 196.91,323.91 195.47,323.91 190.89,319.34 v1(190.89,307.34)
BACKPLANE_OUT<7>: length 27.6
  TOP w0.178: U14.9 192.13,307.34 ; 192.13,307.34 192.13,310.3 192.33,310.5 196.65,310.5 197.05,310.9 197.05,322.9 198.06,323.91 199.45,323.91 U16.6 ; 192.13,307.34 192.13,306.07 U14.8
BACKPLANE_OUT<8>: length 25.1
  TOP w0.178: 194.18,313.69 194.18,312.67 193.93,312.42 U14.13 ; 194.18,313.69 U14.14 ; 194.18,313.69 194.18,325.18 195.45,326.45 201.87,326.45 U16.8
BACKPLANE_OUT<9>: length 22.5
  TOP w0.178: U15.3 214.38,309.25 214.63,309.5 214.63,311.53 214.38,311.79 U15.1 212.48,311.79 210.58,313.69 210.58,315.88 204.76,321.7 204.76,324.14 U16.10
BACKPLANE_OUT<10>: length 25.9
  TOP w0.178: 219.71,310.52 219.94,310.74 219.94,316.1 213.46,322.58 U16.9 ; 219.71,310.52 218.38,310.52 ; 219.71,310.52 219.71,310.26 218.69,309.25 U15.6
CNTRL_RAW<0>: length 32.9
  TOP w0.178: TP8.1 66.33,332.74 66.33,331.76 U3.11 ; U4.2 v1(66.04,318.11) ; U2.3 v1(74.16,331.47)
  BOTTOM w0.178: 67.83,331.47 67.31,331.47 TP8.1 ; 67.83,331.47 67.83,318.11 v1(66.04,318.11) ; 67.83,331.47 v1(74.16,331.47)
CNTRL_RAW<1>: length 54
  TOP w0.178: U2.4 83.25,332.74 83.25,318.71 75.56,318.71 TP7.1 75.56,321.37 v1(65.72,321.37) 64.77,321.37 U4.3 ; U3.12 v1(65.72,332.41)
  BOTTOM w0.178: v1(65.72,321.37) v1(65.72,332.41)
CNTRL_RAW<2>: length 44.9
  TOP w0.178: U2.5 79.96,334.01 79.96,339.09 TP6.1 ; U3.13 v1(62.76,333.07) ; U4.4 v1(63.5,321.11)
  BOTTOM w0.178: v1(63.5,321.11) 63.5,333.07 ; 63.5,333.07 63.5,334.37 67.31,334.37 TP6.1 ; 63.5,333.07 v1(62.76,333.07)
CNTRL_RAW<3>: length 45.1
  TOP w0.178: U4.5 v1(62.23,321.11) ; U3.14 v1(62.23,333.72) ; U2.6 78.89,335.28 78.89,337.44 60.96,337.44 TP5.1
  BOTTOM w0.178: v1(62.23,321.11) v1(62.23,333.72) 60.96,333.72 TP5.1
CNTRL_RAW<4>: length 50.2
  TOP w0.178: U3.3 55.59,333.72 55.59,332.74 TP4.1 ; U2.10 v1(70.73,334.01) ; U4.6 v1(60.96,321.11)
  BOTTOM w0.178: v1(70.73,334.01) 66.24,334.01 66.24,320.23 60.44,320.23 60.44,321.11 ; 60.44,321.11 54.61,321.11 TP4.1 ; 60.44,321.11 v1(60.96,321.11)
CNTRL_RAW<5>: length 50.9
  TOP w0.178: TP3.1 53.28,339.09 53.28,331.76 55.94,331.76 55.94,333.07 U3.4 v1(61.48,333.07) 61.48,329.73 70.87,329.73 70.87,332.74 U2.11 ; v1(61.48,322.2) 59.69,322.2 U4.7
  BOTTOM w0.178: v1(61.48,333.07) v1(61.48,322.2)
CNTRL_RAW<6>: length 70.5
  TOP w0.178: U3.5 v1(59.02,332.41) ; v1(81.92,330.94) 72.24,330.94 72.24,331.47 U2.12 ; U4.8 v1(58.42,323.76)
  BOTTOM w0.178: TP2.1 v1(81.92,330.94) 81.92,340.42 59.02,340.42 v1(59.02,332.41) 58.42,332.41 v1(58.42,323.76)
CNTRL_RAW<7>: length 48.5
  TOP w0.178: U2.13 73.94,330.2 73.94,327.65 ; 73.94,327.65 58.5,327.65 ; 73.94,327.65 73.94,323.51 81.92,323.51 TP1.1 ; 58.5,327.65 58.5,331.76 U3.6 ; 58.5,327.65 57.15,327.65 U4.9
RIB1_N: length 32.3
  TOP w0.178: U52.3 307.34,246.82 304.36,243.84 302.26,243.84 295.67,250.43 295.67,256.13 289.74,262.06 289.74,264.16 U53.1
RIB1_P: length 39.5
  TOP w0.178: U53.2 289.56,265.54 288.58,264.57 288.58,263.75 289.38,262.95 289.38,261.91 295.31,255.98 295.31,250.15 302.26,243.2 304.66,243.2 309.12,247.66 U52.4
RIB2_N: length 42.9
  TOP w0.178: v1(288.29,254.63) U51.5 ; v1(292.62,254.19) v1(292.62,252.85) 292.62,252.01 292.72,252.01 292.88,251.85 292.88,250.76 292.75,250.76 v1(292.75,250.24)
  BOTTOM w0.178: v1(292.62,254.19) 292.1,254.19 292.1,254.45 288.85,254.45 288.66,254.26 v1(288.29,254.63) ; R95.2 287.2,259.08 287.2,260.05 292.19,260.05 293.76,258.48 293.76,253.62 293.14,253 293.14,252.85 v1(292.62,252.85) ; U54.1 298.7,238.76 298.51,238.95 298.51,239.99 295.86,242.65 295.86,250.11 293.62,250.11 293.59,250.15 293.59,250.24 v1(292.75,250.24)
RIB2_P: length 49.2
  TOP w0.178: v1(293.24,254.81) 293.24,254.29 293.24,254.29 293.24,252.75 293.24,252.75 v1(293.24,252.23) 293.24,251.71 293.24,251.71 293.24,250.49 293.37,250.36 v1(293.37,249.63) ; v1(285.75,254.63) U51.7
  BOTTOM w0.178: v1(293.24,252.23) 293.61,252.6 293.61,252.96 294.12,253.47 294.12,258.63 292.34,260.4 286.84,260.4 286.84,259.08 R94.2 ; v1(293.24,254.81) 288.85,254.81 288.51,255.15 288.07,255.15 287.55,254.63 v1(285.75,254.63) ; v1(293.37,249.63) 293.89,249.63 293.89,249.76 295.5,249.76 295.5,242.5 298.16,239.84 298.16,238.8 299.72,237.24 U54.2
RIB3_N: length 31.9
  TOP w0.178: U51.3 291.34,255.33 293.89,255.33 293.89,239.9 293.31,239.31 293.31,238.21 294.2,237.31 296.2,237.31 296.2,235.81 296.77,235.24 297.59,235.24 298.16,235.81 298.16,236.63 297.54,237.25 297.54,237.82 297.33,238.02 297.18,238.02 U54.3
RIB3_P: length 27.6
  TOP w0.178: U51.4 289.56,255.69 294.25,255.69 294.25,239.75 293.66,239.17 293.66,238.35 294.35,237.67 297.18,237.67 U54.4
RIB4_N: length 25
  TOP w0.178: U52.12 303.53,257.43 v1(303.16,257.81) ; U53.3 292.1,261.47 294.67,258.9 296.49,258.9 296.76,258.64 v1(297.49,258.64) 298.01,258.64 298.01,258.9 301.31,258.9 301.65,258.56 302.08,258.56 302.6,259.08 v1(302.65,259.08)
  BOTTOM w0.178: v1(297.49,258.64) 297.49,257.72 302.34,257.72 302.42,257.81 v1(303.16,257.81) ; R91.2 v1(302.65,259.08)
RIB4_P: length 27.1
  TOP w0.178: v1(302.63,257.28) 302.63,256.63 302.26,256.63 U52.13 ; U53.4 292.1,265.54 293.08,264.57 293.08,263.75 292.46,263.13 292.46,261.62 294.82,259.26 v1(296.88,259.26) 301.31,259.26 301.5,259.45 v1(301.87,259.08)
  BOTTOM w0.178: v1(296.88,259.26) 296.88,258.42 296.97,258.42 297.01,258.39 297.01,257.37 302.11,257.37 302.11,257.28 v1(302.63,257.28) ; R90.2 v1(301.87,259.08)
RIB5_N: length 32.3
  TOP w0.178: U52.8 309.97,254 309.97,254.41 309.84,254.53 308.58,254.53 308.56,254.55 308.56,261.88 301.7,268.74 294.46,268.74 294.46,267.91 293.66,267.11 293.66,266.29 294.64,265.32 U53.5
RIB5_P: length 26.3
  TOP w0.178: U53.6 294.82,266.7 294.82,268.39 301.55,268.39 308.21,261.73 308.21,256.65 307.87,256.31 307.87,255.05 307.75,254.93 307.34,254.93 U52.9
RIB6_N: length 26
  TOP w0.178: U51.12 v1(280.67,250.19)
  BOTTOM w0.178: 286.02,251.41 R97.2 ; 286.02,251.41 284.8,250.19 v1(280.67,250.19) ; 286.02,251.41 286.02,250.56 286.38,250.19 289.56,250.19 290.83,248.92 290.83,247.65 294.64,243.84 U54.5
RIB6_P: length 26.3
  TOP w0.178: U51.13 v1(280.67,248.92)
  BOTTOM w0.178: U54.6 293.38,237.48 293.38,240.05 294,240.67 294,243.66 290.65,247.01 287.02,247.01 286.02,248.02 R96.2 v1(280.67,248.92)
RIB7_N: length 24.9
  TOP w0.178: U51.8 284.48,254.93 283.95,254.93 283.95,241.73 288.01,237.67 291.01,237.67 U54.7
RIB7_P: length 24
  TOP w0.178: U51.9 283.59,254 283.59,241.58 287.86,237.31 291.01,237.31 U54.8
RIB8_N: length 18.3
  TOP w0.178: v1(296.54,262.25) 297.18,262.89 U53.7 ; U52.15 300.16,252.73 299.69,252.26 299.69,251.94 299.21,251.46 v1(297.18,251.46)
  BOTTOM w0.178: v1(296.54,262.25) 296.54,261.73 295.91,261.1 295.91,253.54 296.09,253.36 296.09,253.19 296.28,253 R93.2 v1(297.18,251.46)
RIB8_P: length 30.5
  TOP w0.178: v1(299.42,250.66) 299.42,250.66 299.42,250.47 299.63,250.26 300.48,250.26 U52.17 303.38,250.19 304.06,250.87 304.06,260.26 301.66,262.67 299.19,262.67 298.51,263.34 298.51,265.37 U53.8
  BOTTOM w0.178: v1(299.42,250.66) 301.16,248.92 R92.2
RIB9_N: length 29.9
  TOP w0.178: v1(306.94,249.89) 306.42,249.89 306.42,249.81 301.37,249.81 301.02,249.45 299.76,249.45 299.63,249.33 299.63,248.92 U52.18
  BOTTOM w0.178: v1(306.94,249.89) 306.94,250.41 307.03,250.41 307.03,261.61 303.39,265.25 300.81,265.25 U53.9
RIB9_P: length 29.7
  TOP w0.178: U52.19 302.26,249.45 306.65,249.45 306.73,249.37 v1(307.47,249.37)
  BOTTOM w0.178: v1(307.47,249.37) 307.47,250.11 307.38,250.19 307.38,261.76 303.54,265.61 300.81,265.61 U53.10
RIB10_N: length 11.1
  TOP w0.178: v1(286.63,243.84) 286.63,245.95 285.75,246.82 U51.15
  BOTTOM w0.178: U54.9 289.56,240.03 286.63,242.97 v1(286.63,243.84) R99.2
RIB10_P: length 14.2
  TOP w0.178: U51.17 288.29,246.82 287.47,246.01 v1(287.47,243.84)
  BOTTOM w0.178: R98.2 v1(287.47,243.84) 287.47,242.75 290.82,239.41 290.82,238.63 289.56,237.38 U54.10
SR_CLK: length 19.9
  TOP w0.178: U3.2 56.41,334.37 56.41,336.55 U2.8
UNNAMED_1_74F164_I1_GND: length 14.4
  TOP w0.178: U2.7 75.72,336.55 75.72,335.81 69.19,335.81 69.19,332.21 69.85,332.21 C1.1
UNNAMED_1_74F164_I1_VCC: length 12.5
  TOP w0.178: U2.14 71.88,328.93 71.88,332 73.94,332 73.94,333.27 69.85,333.27 C1.2
UNNAMED_1_CNTRLREGISTER_I10_REA: length 7.7
  TOP w0.178: U3.15 62.07,334.37 62.07,335.02 U3.1
UNNAMED_1_CNTRLREGISTER_I10_REG: length 3.4
  TOP w0.178: U3.10 65.86,331.11 65.86,330.46 U3.9
UNNAMED_1_CSMD0603_I6_A: length 5
  TOP w0.178: C3.1 67.31,313.69 U4.20
UNNAMED_1_CSMD0603_I6_B: length 19
  TOP w0.178: C3.2 55.88,315.01 U4.10
UNNAMED_1_CSMD0805_I6_A: length 10.4
  TOP w0.178: C17.1 200.65,317.5 199.25,316.1 199.25,311.35 U13.4
UNNAMED_1_CSMD0805_I7_A_1: length 10.3
  TOP w0.178: C18.1 205.1,302.26 206.88,304.04 206.88,309.63 206.63,309.88 U13.11
UNNAMED_1_CSMD0805_I8_A_1: length 11.8
  TOP w0.178: U14.4 186.69,309.88 185.42,311.15 185.42,314.44 188.48,317.5 C19.1
UNNAMED_1_CSMD0805_I9_B_1: length 11.3
  TOP w0.178: C16.2 192.46,302.26 195.25,305.05 195.25,308.61 193.98,309.88 U14.11
UNNAMED_1_CSMD0805_I10_A: length 6.3
  TOP w0.178: C21.1 216.9,316.6 218.38,315.12 U15.8
UNNAMED_1_CSMD0805_I11_A: length 8.4
  TOP w0.178: C20.1 214,302.26 212.22,304.04 212.22,307.72 212.47,307.98 U15.4
UNNAMED_1_HCT374_I2_Q6: length 6.5
  TOP w0.178: TP9.1 58.42,307.34 U4.13
UNNAMED_1_HCT374_I2_Q7: length 6.5
  TOP w0.178: U4.12 57.15,307.34 TP10.1
VTT: length 22.1
  TOP w0.178: R89.1 v1(314.96,245.11) ; R88.1 v1(314.96,257.18)
  BOTTOM w0.178: R94.1 v1(281.3,259.08) ; R93.1 v1(297.18,256.54) ; v1(306.07,260.35) 305.8,260.08 R91.1 ; v1(298.45,260.35) 298.72,260.08 R90.1 ; v1(306.07,250.82) 305.8,250.56 R92.1 ; R98.1 290.56,242.2 v1(290.83,241.93) ; R95.1 290.56,258.08 v1(290.83,257.81) ; R97.1 v1(289.56,251.46) ; R96.1 v1(289.56,248.92) ; R99.1 v1(281.3,243.84)
